# Altium PCB PCB1.PcbDoc
Units mil, origin at the board's own origin, x right, y up, seen from the top; angles counter-clockwise.
Board outline 6000 x 4000 mil, 2 copper layers (Top Layer, Bottom Layer); 28 components, 18 nets, 93 pads, 134 vias.
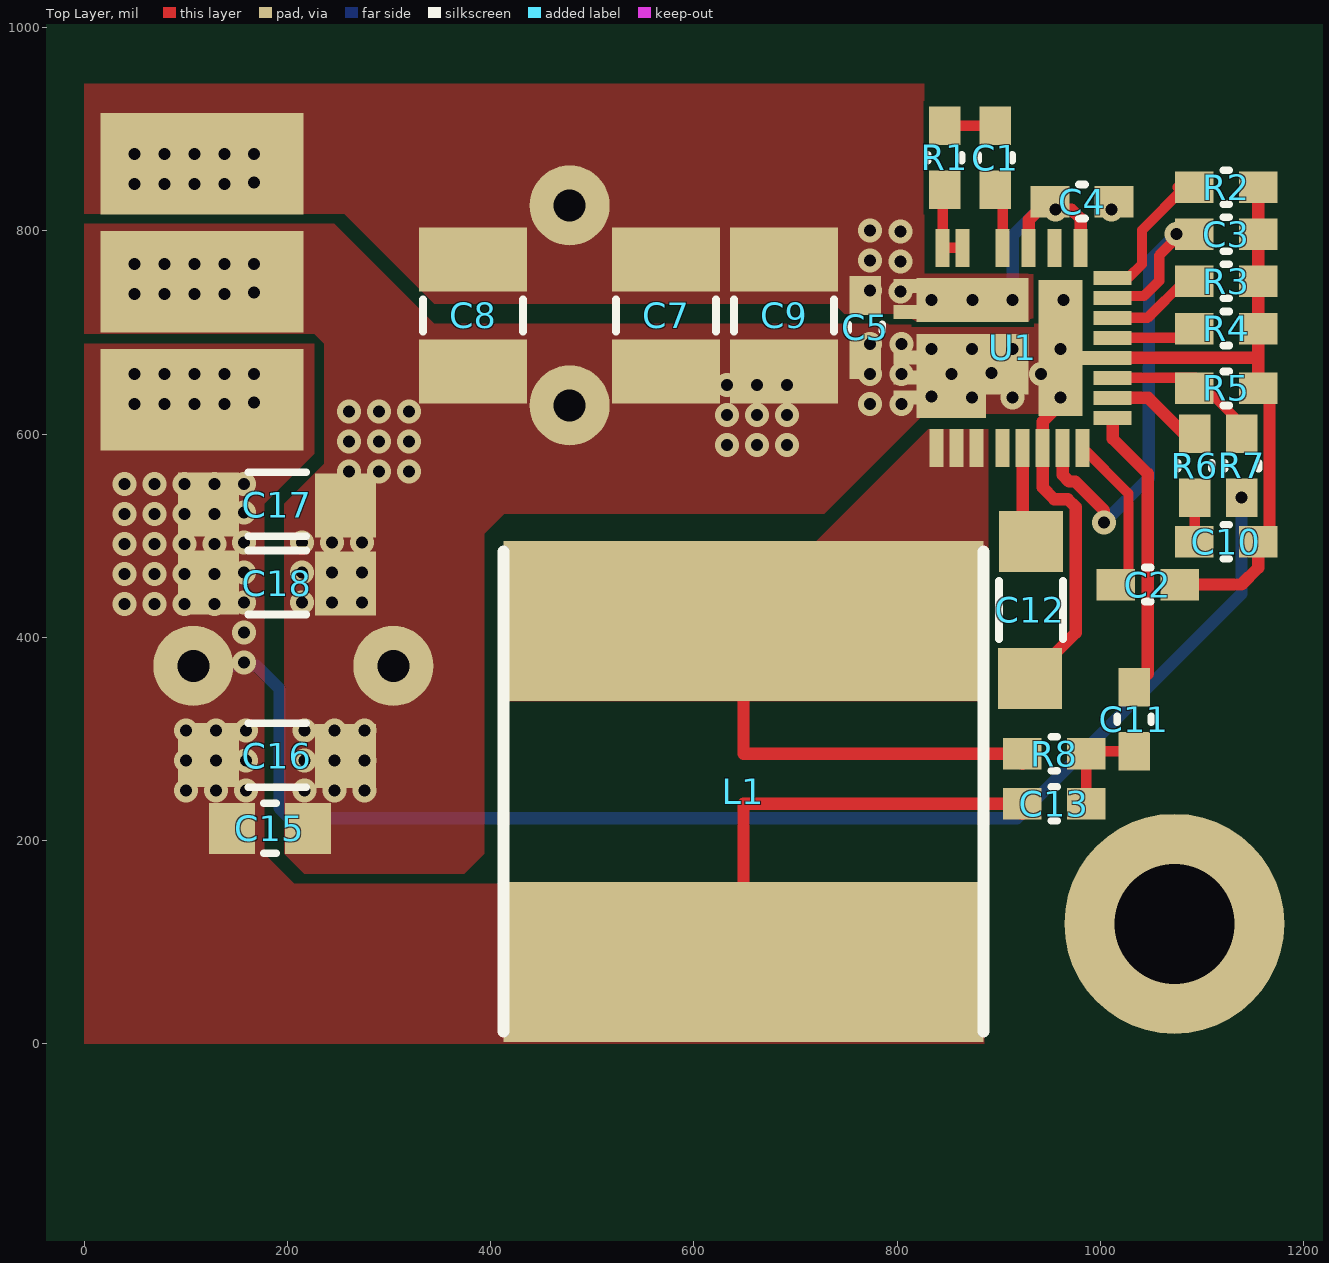
[diagram p0: Top Layer view]
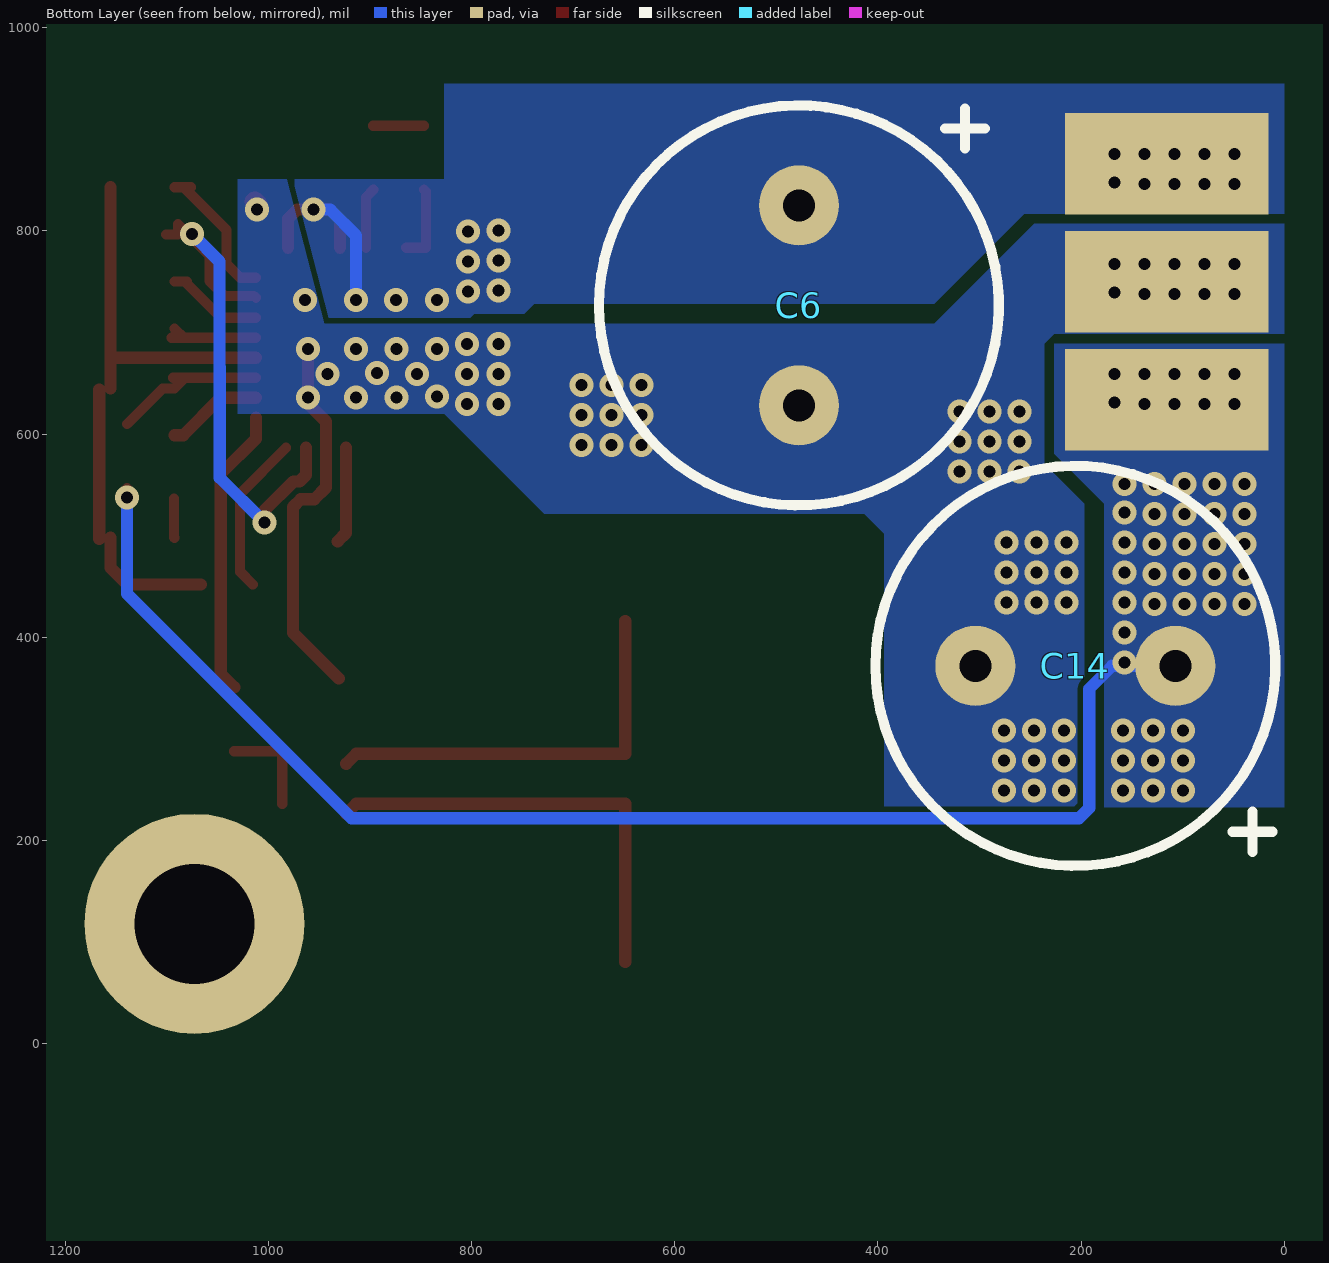
[diagram p1: Bottom Layer view, seen from below]
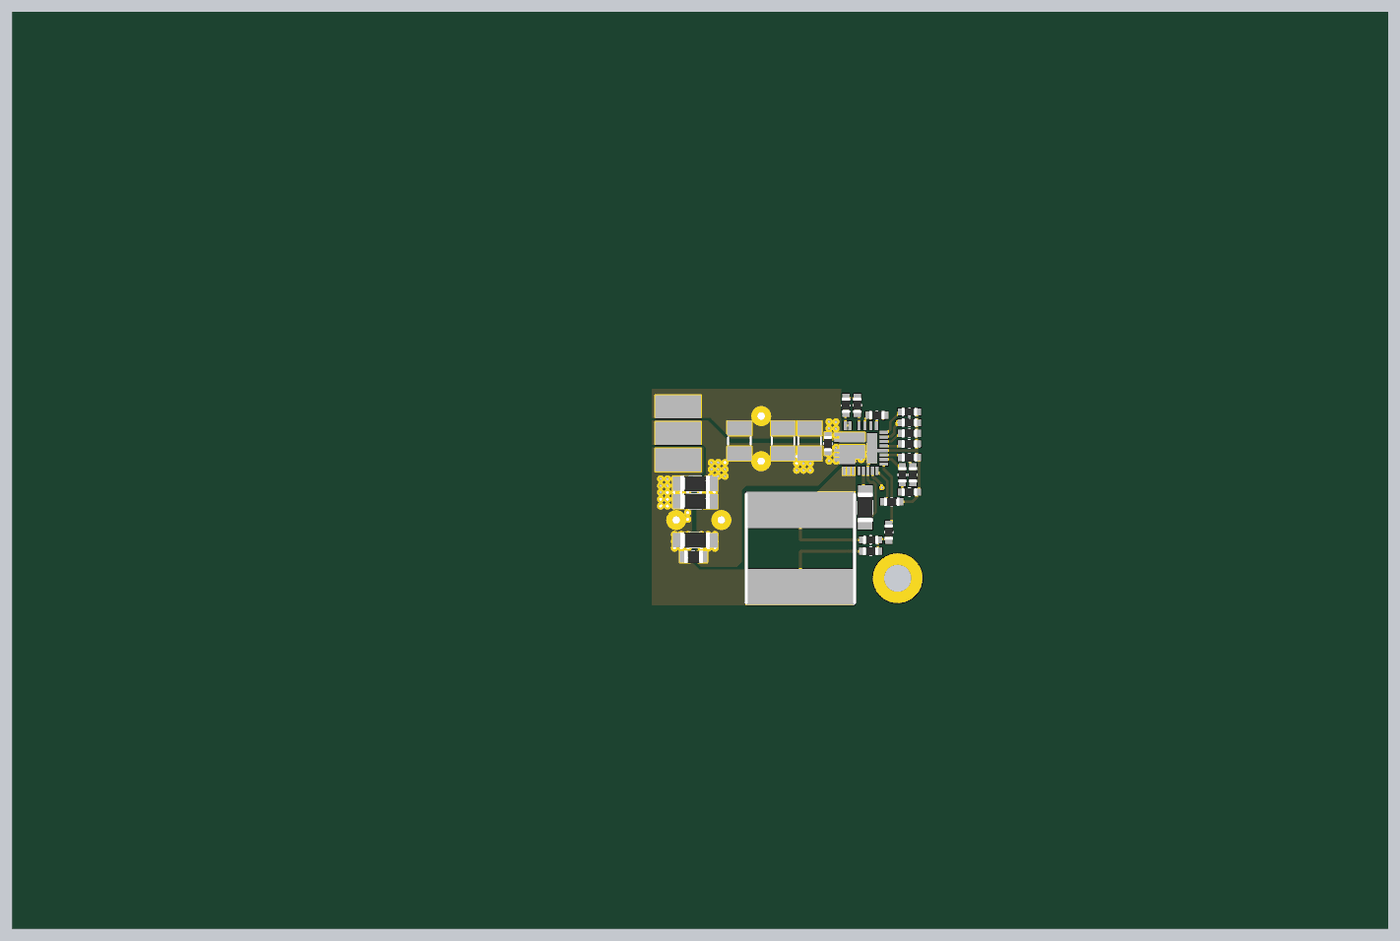
[diagram p2: 3D render of the assembled board from above, using the file's embedded part models]

## Layer stack, top to bottom
Top Solder: solder mask 0.4, Solder Resist, Dk 3.5
Top Layer: signal copper 1.4
Dielectric 1: dielectric 12.6, FR-4, Dk 4.8
Bottom Layer: signal copper 1.4
Bottom Solder: solder mask 0.4, Solder Resist, Dk 3.5

## Board outline
-2788,-1411 3212,-1411 3212,2589 -2788,2589

## Design rules (kind name [scope] priority, off if disabled: settings)
Clearance [All] p1: gap=5.5 ignorepadtopadclearanceinfootprint=FALSE
PolygonConnect [All] p1: connectstyle=Direct reliefconductorwidth=10 reliefentries=4 polygonreliefangle="90 Angle" airgapwidth=10
RoutingVias [All] p1: holewidth=28 width=50 viastyle="Through Hole" minholewidth=28 minwidth=50 maxholewidth=28 maxwidth=50
SilkToSilkClearance [All] p1 off: silktosilkclearance=10
SilkToSolderMaskClearance [IsPad] p1 off: minsilkscreentomaskgap=10 clearancetoexposedcopper=TRUE
SolderMaskExpansion [All] p1: expansion=4
Width [All] p1: maxlimit=500 minlimit=10 preferedwidth=10 minimp=50.000000 maximp=50.000000 favimp=50.000000
28 further rules are at their usual default settings.

## Components (designator, comment, footprint, x,y, rotation, side; value= is the part's Value field where it differs from the comment)
C1 "0.1Uf" RR_0603 896.75,872 r270 top
C2 "33nF" RR_0603 1046.75,452 r0 top
C3 "1uF" RR_0603 1123.94,796.67 r180 top
C4 "0.1Uf" RR_0603 982,829 r0 top
C5 "0.1Uf" RR_0603 768.75,705 r270 top
C6 "100uF 63V" RR_CAP-RAD-D10x9 477.75,726.81 r270 bottom
C7 "2.2uF" RR_1210 572.75,717 r90 top
C8 "2.2uF" RR_1210 382.75,717 r90 top
C9 "2.2uF" RR_1210 688.75,717 r90 top
C10 "220p" RR_0603 1123.94,494 r180 top
C11 "2.2nF" RR_0603 1033.46,319.45 r270 top
C12 "4.7uF" RR_1206 931.75,427 r90 top
C13 "1.2nF" RR_0603 954.72,236.22 r180 top
C14 "100u, 20V" RR_CAP-RAD-D10x9 205.68,372 r0 bottom
C15 "0.1Uf" RR_0805 182.75,212 r0 top
C16 "22uF" RR_1206 189.75,284 r180 top
C17 "DNP" RR_1206 189.75,531 r180 top
C18 "22uF" RR_1206 189.75,454 r180 top
L1 "" RR_IND_CMD_12x12 648.75,248.2 r90 top
R1 "3.3" RR_0603 846.75,872 r90 top
R2 "2K" RR_0603 1123.94,843 r0 top
R3 "60.4k" RR_0603 1123.94,750.33 r180 top
R4 "127K" RR_0603 1123.94,704 r180 top
R5 "10K" RR_0603 1123.94,645 r180 top
R6 "732K" RR_0603 1092.94,569 r90 top
R7 "140K" RR_0603 1139,569 r270 top
R8 "17.4K" RR_0603 954.72,285.43 r180 top
U1 "SiC462" SIC462 913.75,685 r270 top

## Footprints (in the part's own frame and the unit in brackets; to place one, negate y for a bottom-side part, rotate by r counter-clockwise, add the part's x,y. Pads: shape width x height; smd on the part's side, far side on the other; paste and mask are expansions set on the pad)
RR_0603 [mil] "Chip Resistor; Body 1.6 x 0.8 mm (LxW typ)"
  rect 38x31 smd: 1(-31.5,0) 2(31.5,0)
  silkscreen extent -3,-17 3,17, body extent -33,-18 33,18, height 22
RR_0805 [mil] "Chip Resistor; Body 1.6 x 0.8 mm (LxW typ)"
  rect 45x50 smd: 1(-37.5,0) 2(37.5,0)
  silkscreen extent -6,-25 6,25, body extent -41,-27 41,27, height 24
RR_1206 [mil] "Chip Resistor; Body 1.6 x 0.8 mm (LxW typ)"
  rect 60x63 smd: 1(-67.5,0.98) 2(67.5,0)
  silkscreen extent -29,-31 29,31, body extent -65,-33 65,33, height 26
RR_1210 [mm] "Chip Capacitor; Body 3.2 x 2.5 mm (LxW typ)"
  rect 1.6x2.7 smd: 1(-1.4,0) 2(1.4,0)
  silkscreen extent -0.4,-1.25 0.4,1.25, body extent -1.6,-1.25 1.6,1.25, height 2.5
RR_CAP-RAD-D10x9 [mm] "pitch 5mm"
  round 2 hole 0.8: 1(-2.5,0) 2(2.5,0)
  silkscreen extent -5,-5 5,5, body extent -5.08,-5.08 5.08,5.08, height 11.5
RR_IND_CMD_12x12 [mm]
  rect 4x12 smd: 1(-4.262,0) 2(4.262,0)
  silkscreen extent -6,-6 6,6, body extent -6,-6 6,6, height 10
SIC462 [mm]
  rect 0.95x0.35 smd: 1(-2.5,1.7) 2(-2.5,1.05) 3(-2.5,0.4) 4(-2.5,-0.25) 5(-2.5,-1.25) 6(-2.5,-1.75) 12(2.5,-0.9) 12(2.5,-1.9) 12(2.5,-1.4) 15(2.5,-0.25) 16(2.5,0.25) 17(2.5,0.75) 18(2.5,1.25) 19(2.5,1.75)
  rect 0.35x0.95 smd: 7(-1.54,-2.5) 7(-0.89,-2.5) 9(0.24,-2.5) 9(0.74,-2.5) 9(1.24,-2.5) 20(1.75,2.5) 21(1.25,2.5) 22(0.75,2.5) 23(0.25,2.5) 23(0.25,2) 24(-0.25,2.5) 25(-0.75,2.5) 26(-1.25,2.5) 27(-1.75,2.5)
  rect 1.1x2.8 smd: 7(-1.2,-1)
  rect 1.52x1.1 smd: 9(0.41,-0.15)
  rect 2.1x1.73 smd: 9(0.7,-1.535)
  rect 3.4x1.1 smd: 23(0,1.2)
  body extent -2.5,-2.5 2.5,2.5, height 1

## Part data
C1 C4 C5 C15: library part "CAP NP", "Ceramic Cap, 0.1uF,100volts, X7S, 10%, 0603", Mfr="Murata Electronics", Mfr Part Number=C1608X7S2A104K080AB, Package=0603, Tolerance=10%, Value1=0.1uF, Data sheet\=http://www.mouser.com/ds/2/400/lcc_commercial_general_en-837201.pdf, Description1="Ceramic Cap, 0.1uF,100volts, X7S, 10%, 0603", Description2="Ceramic Cap, 0.1uF,100volts, X7S, 10%, 0603", DIGI-KEY=810-C1608X7S2A104K, DigikeyMouser=810-C1608X7S2A104K, Package1=0603, Package2=0603, PCB Footprint1=0603, PCB Footprint2=0603, Value2=0.1uF
C2: library part "CAP NP", "Ceramic Cap, 0.033uF,50V,X7R,0603,10%", Manufacturer=Vishay, Manufacturer Part=VJ0603Y333KXACW1BC, Mfr="Vishay / Vitramon", Package=0603, Tolerance=10%, Voltage=50V, Data sheet\=http://www.mouser.com/ds/2/427/vjw1bcbascomseries-223529.pdf, Description1="Ceramic Cap, 0.033uF,50V,X7R,0603,10%", Description2="Ceramic Cap, 0.033uF,50V,X7R,0603,10%", DIGI-KEY=77-VJ0603Y333KXACBC, DigikeyMouser=77-VJ0603Y333KXACBC, Manufacturer1=Vishay, Manufacturer2=Vishay, Manufacturer Part1=VJ0603Y333KXACW1BC, Manufacturer Part2=VJ0603Y333KXACW1BC, Mfr Part Number=VJ0603Y333KXACW1BC, Package1=0603, Package2=0603, Value1=33nF, Value2=33nF
C3: library part "CAP NP", "Ceramic Cap, 1uF,50V, X7R,0603,10%", Manufacturer="Taiyo Yuden", Manufacturer Part=UMK107AB7105KA-T, Package=0603, Tolerance=10%, Voltage=50V, Data sheet\=http://www.mouser.com/ds/2/396/mlcc11_hq_e-541564.pdf, Description1="Ceramic Cap, 1uF,50V, X7R,0603,10%", Description2="Ceramic Cap, 1uF,50V, X7R,0603,10%", DIGI-KEY=963-UMK107AB7105KA-T, DigikeyMouser=963-UMK107AB7105KA-T, Manufacturer1="Taiyo Yuden", Manufacturer2="Taiyo Yuden", Manufacturer Part1=UMK107AB7105KA-T, Manufacturer Part2=UMK107AB7105KA-T, Mfr="Taiyo Yuden", Mfr Part Number=UMK107AB7105KA-T, Package1=0603, Package2=0603, Value1=1uF, Value2=1uF
C6: library part "CAP POL", "CAP, alum, 100uF, 63volt, 105C, 10x12, 4khr", Manufacturer=Vishay, Mfr Part Number=MAL215058101E3, Rating=63V, Tolerance=20%, Data sheet\=http://www.mouser.com/ds/2/427/150rmi-222630.pdf, DIGI-KEY=594-2222-150-58101, DigikeyMouser=594-2222-150-58101, Mfr=Vishay, Part Type="CAP POL"
C7 C8 C9: library part "CAP NP", "Ceramic Cap, 2.2uF,100volts, X7R, 10%, 1210", Mfr="Murata Electronics", Mfr Part Number=GRM32ER72A225KA35K, Data sheet\=http://www.mouser.com/ds/2/281/c02e-2905.pdf, Description1="Ceramic Cap, 2.2uF,100volts, X7R, 10%, 1210", Description2="Ceramic Cap, 2.2uF,100volts, X7R, 10%, 1210", DIGI-KEY=81-GRM32ER72A225KA5K, DigikeyMouser=81-GRM32ER72A225KA5K, Value1=2.2uF, Value2=2.2uF
C10: library part "CAP NP", "Ceramic Cap, 220p,100V,COG,0603, 5%", Manufacturer=Vishay, Manufacturer Part=VJ0603A221JXBPW1BC, Package=0603, Tolerance=5%, Voltage=100V, Data sheet\=http://www.mouser.com/ds/2/427/vjw1bcbascomseries-223529.pdf, Description1="Ceramic Cap, 220p,100V,COG,0603, 5%", Description2="Ceramic Cap, 220p,100V,COG,0603, 5%", DIGI-KEY=77-VJ0603A221JXBPBC, DigikeyMouser=77-VJ0603A221JXBPBC, Manufacturer1=Vishay, Manufacturer2=Vishay, Manufacturer Part1=VJ0603A221JXBPW1BC, Manufacturer Part2=VJ0603A221JXBPW1BC, Mfr=Vishay, Mfr Part Number=VJ0603A221JXBPW1BC, Package1=0603, Package2=0603, Value1=220p, Value2=220p
C11: library part "CAP NP", "Ceramic Cap, 2200pF,100V,X7R,0603, 5%", Manufacturer=Vishay, Manufacturer Part=VJ0603Y222JXBCW1BC, Package=0603, Tolerance=5%, Voltage=100V, Data sheet\=http://www.mouser.com/ds/2/427/vjw1bcbascomseries-223529.pdf, Description1="Ceramic Cap, 2200pF,100V,X7R,0603, 5%", Description2="Ceramic Cap, 2200pF,100V,X7R,0603, 5%", DIGI-KEY=77-VJ0603Y222JXBCBC, DigikeyMouser=77-VJ0603Y222JXBCBC, Manufacturer1=Vishay, Manufacturer2=Vishay, Manufacturer Part1=VJ0603Y222JXBCW1BC, Manufacturer Part2=VJ0603Y222JXBCW1BC, Mfr=Vishay, Mfr Part Number=VJ0603Y222JXBCW1BC, Package1=0603, Package2=0603, Value1=2.2nF, Value2=2.2nF
C12: library part "CAP NP", "Ceramic Cap, 4.7uF,25V,X6S,10%,0603", Mfr=Murata, Mfr Part Number=GRM188C81E475KE11D, Tolerance=10%, Voltage=25V, Data sheet\=http://www.mouser.com/ds/2/281/c02e-2905.pdf, Description1="Ceramic Cap, 4.7uF,25V,X6S,10%,0603", Description2="Ceramic Cap, 4.7uF,25V,X6S,10%,0603", DIGI-KEY=81-GRM188C81E475KE1D, DigikeyMouser=81-GRM188C81E475KE1D, Value1=4.7uF, Value2=4.7uF
C13: library part "CAP NP", "Ceramic Cap, 1.2nF,100V,X7R,0805, 10%", Manufacturer=Vishay, Manufacturer Part=VJ0805Y122KXBPW1BC, Mfr="Vishay / Vitramon", Package=0805, Tolerance=10%, Voltage=100V, Data sheet\=http://www.mouser.com/ds/2/427/vjw1bcbascomseries-223529.pdf, Description1="Ceramic Cap, 1.2nF,100V,X7R,0805, 10%", Description2="Ceramic Cap, 1.2nF,100V,X7R,0805, 10%", DIGI-KEY=77-VJ0805Y122KXBPBC, DigikeyMouser=77-VJ0805Y122KXBPBC, Manufacturer1=Vishay, Manufacturer2=Vishay, Manufacturer Part1=VJ0805Y122KXBPW1BC, Manufacturer Part2=VJ0805Y122KXBPW1BC, Mfr Part Number=VJ0805Y122KXBPW1BC, Package1=0805, Package2=0805, Value1=1.2nF, Value2=1.2nF
C14: library part "CAP, TA-P,V,470u, 2V_0", "Polymer SMD 20volts 100uF ESR 55mohm 7343", Mfr=Panasonic, Mfr Part Number=20TQC100MYF, Data sheet\=http://www.mouser.com/ds/2/315/AAA8000C54-931458.pdf, DIGI-KEY=667-20TQC100MYF, DigikeyMouser=667-20TQC100MYF
C16 C18: library part "CAP NP", "Ceramic Cap, 22uF,25volts,X7R,10%,1206", Mfr="AVX Corporation", Mfr Part Number=12061C225KAT2A, Tolerance=10%, Voltage=100V, Data sheet\=http://www.mouser.com/ds/2/40/X7RDielectric-777024.pdf, Description1="Ceramic Cap, 22uF,25volts,X7R,10%,1206", Description2="Ceramic Cap, 22uF,25volts,X7R,10%,1206", DIGI-KEY=581-12061C225KAT2A, DigikeyMouser=581-12061C225KAT2A, Value1=22uF, Value2=22uF
C17: library part "CAP NP", "Ceramic Cap, 22uF,25volts,X7R,10%,1206", Mfr="AVX Corporation", Mfr Part Number=12061C225KAT2A, Tolerance=10%, Value1=22uF, Voltage=100V, Data sheet\=http://www.mouser.com/ds/2/40/X7RDielectric-777024.pdf, Description1="Ceramic Cap, 22uF,25volts,X7R,10%,1206", Description2="Ceramic Cap, 22uF,25volts,X7R,10%,1206", DIGI-KEY=581-12061C225KAT2A, DigikeyMouser=581-12061C225KAT2A, Value2=22uF
L1: library part IND, "INDUCTOR, 3.3uH,20%,14m DCR,18.6A Saturation", Current=8A, Manufacturer=Vishay, Manufacturer Part=IHLP4040DZER3R3M11, Manufacturer Part1=IHLP4040DZER5R6M01, Manufacturer Part2=IHLP5050FDER100M01, Mfr="Vishay Dale", Mfr Part Number=IHLP4040DZER100M01, Package1=4040, Package2=5050, PSpice Template="L^@REFDES %A %B @ MODEL @VALUE", Value1=5.6uH, Value2=10uH, Data sheet\=http://www.vishay.com/docs/34193/lp40dz01.pdf, Description1="INDUCTOR, 5.6uH,20%,19m DCR,16A Saturation", Description2="INDUCTOR, 10uH,20%,17.2m DCR,15.5A Saturation", DigikeyMouser=541-1295-1-ND, Manufacturer1=Vishay, Manufacturer2=Vishay
R1: library part RESISTOR, "SMD,3.3Ohm, 1% 0603", Man Part Number=CRCW06033R30FKEA, Manufacturer=Vishay, Manufacturer Part=CRCW06030000ZSTA, Package=0603, Data sheet\=http://www.mouser.com/ds/2/427/dcrcwe3-109170.pdf, Description1="SMD,3.3Ohm, 1% 0603", Description2="SMD,3.3Ohm, 1% 0603", DIGI-KEY=71-CRCW06033R30FKEA, DigikeyMouser=71-CRCW06033R30FKEA, Man=Vishay, Man1=Vishay, Man2=Vishay, Man Part Number1=CRCW06033R30FKEA, Man Part Number2=CRCW06033R30FKEA, Manufacturer1=Vishay, Manufacturer2=Vishay, Manufacturer Part1=CRCW06030000ZSTA, Manufacturer Part2=CRCW06030000ZSTA, Mfr=Vishay, Mfr Part Number=CRCW06033R30FKEA, Package1=0603, Package2=0603, PCB Footprint1=0603, PCB Footprint2=0603, Value1=3.3, Value2=3.3
R2: library part RESISTOR, "SMD,2K,1%,0603", Manufacturer=Vishay, Manufacturer Part=CRCW06032K00FKEB, Mfr="Vishay Dale", Package=0603, Tolerance=1%, Data sheet\=http://www.mouser.com/ds/2/427/dcrcwe3-109170.pdf, Description1=SMD,2K,1%,0603, Description2=SMD,2K,1%,0603, DIGI-KEY=71-CRCW06032K00FKEB, DigikeyMouser=71-CRCW06032K00FKEB, Manufacturer1=Vishay, Manufacturer2=Vishay, Manufacturer Part1=CRCW06032K00FKEB, Manufacturer Part2=CRCW06032K00FKEB, Mfr Part Number=CRCW06032K00FKEB, Package1=0603, Package2=0603, Value1=2K, Value2=2K
R3: library part RESISTOR, "SMD,60.4K,1%,0603", Manufacturer=Vishay, Manufacturer Part=CRCW060360K4FKEA, Mfr="Vishay Dale", Package=0603, Tolerance=1%, Value1=60.4K, Data sheet\=http://www.digikey.com/product-detail/en/vishay-dale/CRCW04024K64FKED/541-4.64KLCT-ND/1183198, Description1=SMD,60.4K,1%,0603, Description2=SMD,60.4K,1%,0603, DIGI-KEY=71-CRCW0603-60.4K-E3, DigikeyMouser=71-CRCW0603-60.4K-E3, Manufacturer1=Vishay, Manufacturer2=Vishay, Manufacturer Part1=CRCW060360K4FKEA, Manufacturer Part2=CRCW060360K4FKEA, Mfr Part Number=CRCW060360K4FKEA, Package1=0603, Package2=0603, Value2=60.4K
R4: library part RESISTOR, "SMD,127K,1%,0603 100PPM", Manufacturer=Vishay, Manufacturer Part=CRCW0603127KFKEA, Mfr="Vishay Dale", Package=0603, Tolerance=1%, Data sheet\=http://www.mouser.com/ds/2/427/dcrcwe3-109170.pdf, Description1="SMD,127K,1%,0603 100PPM", Description2="SMD,127K,1%,0603 100PPM", DIGI-KEY=71-CRCW0603-127K-E3, DigikeyMouser=71-CRCW0603-127K-E3, Manufacturer1=Vishay, Manufacturer2=Vishay, Manufacturer Part1=CRCW0603127KFKEA, Manufacturer Part2=CRCW0603127KFKEA, Mfr Part Number=CRCW0603127KFKEA, Package1=0603, Package2=0603, Value1=127K, Value2=127K
R5: library part RESISTOR, "SMD,10K,1%,0603", Manufacturer=Vishay, Manufacturer Part=CRCW060310K0FKTA, Mfr="Vishay Dale", Package=0603, Tolerance=1%, Data sheet\=http://www.mouser.com/ds/2/427/dcrcwe3-109170.pdf, Description1=SMD,10K,1%,0603, Description2=SMD,10K,1%,0603, DIGI-KEY=71-CRCW0603-10K, DigikeyMouser=71-CRCW0603-10K, Manufacturer1=Vishay, Manufacturer2=Vishay, Manufacturer Part1=CRCW060310K0FKTA, Manufacturer Part2=CRCW060310K0FKTA, Mfr Part Number=CRCW060310K0FKTA, Package1=0603, Package2=0603, Value1=10K, Value2=10K
R6: library part RESISTOR, "SMD 1/10watt 732 kOhms 1%,0603", Manufacturer=Vishay, Manufacturer Part=CRCW0603732KFKEA, Mfr="Vishay Dale", Package=0603, Tolerance=1%, Data sheet\=http://www.mouser.com/ds/2/427/dcrcwe3-109170.pdf, Description1="SMD 1/10watt 732 kOhms 1%,0603", Description2="SMD 1/10watt 732 kOhms 1%,0603", DIGI-KEY=71-CRCW0603-732K-E3, DigikeyMouser=71-CRCW0603-732K-E3, Manufacturer1=Vishay, Manufacturer2=Vishay, Manufacturer Part1=CRCW0603732KFKEA, Manufacturer Part2=CRCW0603732KFKEA, Mfr Part Number=CRCW0603732KFKEA, Package1=0603, Package2=0603, Value1=732K, Value2=732K
R7: library part RESISTOR, "SMD 1,10W 140K Ohms 1% 0603", Manufacturer=Vishay, Manufacturer Part=CRCW0603140KFKEA, Mfr="Vishay Dale", Package=0603, Tolerance=1%, Data sheet\=http://www.mouser.com/ds/2/427/dcrcwe3-109170.pdf, Description1="SMD 1,10W 140K Ohms 1% 0603", Description2="SMD 1,10W 140K Ohms 1% 0603", DIGI-KEY=71-CRCW0603-140K-E3, DigikeyMouser=71-CRCW0603-140K-E3, Manufacturer1=Vishay, Manufacturer2=Vishay, Manufacturer Part1=CRCW0603140KFKEA, Manufacturer Part2=CRCW0603140KFKEA, Mfr Part Number=CRCW0603140KFKEA, Package1=0603, Package2=0603, Value1=140K, Value2=140K
R8: library part RESISTOR, "Resistors - SMD 1/8watt 17.4Kohms 1% 0805", Mfr="Vishay Dale", Mfr Part Number=CRCW080517K4FKTA, Tolerance=1%, Data sheet\=http://www.mouser.com/ds/2/427/dcrcw-72725.pdf, Description1="Resistors - SMD 1/8watt 17.4Kohms 1% 0805", Description2="Resistors - SMD 1/8watt 17.4Kohms 1% 0805", DIGI-KEY=71-CRCW0805-17.4K, DigikeyMouser=71-CRCW0805-17.4K
U1: library part SiC462CD-T1-GE3_27, "4.5~60V,6A, High Voltage microBuck", Man Part Number=SiC462ED-T1-GE3, Mfr=Vishay, Data sheet\=http://www.mouser.com/ds/2/427/sic462-1061838.pdf, Description1="4.5~60V,6A, High Voltage microBuck", Description2="4.5~60V,6A, High Voltage microBuck", DIGI-KEY=78-SIC462ED-T1-GE3, DigikeyMouser=78-SIC462ED-T1-GE3, Man=Vishay, Man1=Vishay, Man2=Vishay, Man Part Number1=SiC462ED-T1-GE3, Man Part Number2=SiC462ED-T1-GE3, Mfr Part Number=SiC462ED-T1-GE3, PCB Footprint1=5mmx5mm, PCB Footprint2=5mmx5mm, Value1=SiC462, Value2=SiC462

## Free pads (board coordinates)
  rect 200x100 smd: 2(115.75,634) 2(115.75,750) 2(115.75,866)
  rect 200x100 smd far side: 2(115.75,634) 2(115.75,750) 2(115.75,866)
  round 216.54 hole 118.11: 3(1072.83,118.11)

## Via types
v1: diameter 23.62, hole 11.81, Top Layer to Bottom Layer, 134 vias

## Nets (pads, with @x,y where several pads share a name; then routed paths per layer and width w, separated by ;. In a path a pad name is that pad's centre, name@x,y a point inside that pad or via, vN(x,y) a via of type N, cw(c..) or ccw(c..) an arc to the next point about the centre after c; other vN are vias at no path point)
AGND: C2.2 C3.1 C4.2 C5.2 C6.2 C7.1 C8.1 C9.1 C10.1 C12.1 C14.2 C15.2 C16.1 C17.1 C18.1 pad.2@115.75,750 R2.2 R3.1 R4.1 R5.1 U1.9 U1.17 U1.23 | length 995.3
  Top Layer w12: C12.1 975.75,404.48 975.75,528.26 968.01,536 954.75,536 943.28,547.47 U1.17 943.28,612.53 960.99,630.24 v1(960.99,636.06) v1(960.99,684) U1.23@960.99,685 ; U1.23@1012.17,675.16 1155.44,675.16 ; C2.2@1066.44,452 C2.2 1138.94,452 1155.44,468.5 C10.1 C10.1@1155.44,498 ; R5.1 1155.44,675.16 ; R2.2 C3.1 R3.1 R4.1 1155.44,675.16 ; C10.1@1166.44,497 R5.1@1166.44,644
  Top Layer w20: v1(1011,821) 1011,826.5 C4.2
  other v1: 216.94,249.47 246.47,249.47 276,249.47 216.94,279 246.47,279 276,279 216.94,308.53 246.47,308.53 276,308.53 214.47,434.47 244,434.47 273.53,434.47 214.47,464 244,464 273.53,464 214.47,493.53 244,493.53 273.53,493.53 260.47,563.47 290,563.47 319.53,563.47 632.47,589.47 662,589.47 691.53,589.47 260.47,593 290,593 319.53,593 632.47,619 662,619 691.53,619 260.47,622.53 290,622.53 319.53,622.53 773.53,629.47 804.53,629.47 873.75,636.06 913.75,636.06 833.75,637 632.47,648.53 662,648.53 691.53,648.53 773.53,659 804.53,659 853.53,659 941.53,659 893,660 833.75,684 873.75,684 913.75,684 773.53,688.53 804.53,688.53 963.75,732.24 49.21,738.19 78.74,738.19 108.27,738.19 137.8,738.19 167.13,739.38 49.21,767.72 78.74,767.72 108.27,767.72 137.8,767.72 167.13,767.72
BOOT: C1.2 U1.4 | length 60
  Top Layer w10: C1.2 903.91,833.34 U1.4
COMP: R6.2 U1.21 | length 95.5
  Top Layer w12: U1.21 1046.96,635.79 1083.75,599 R6.2@1092.44,599
FSW: R4.2 U1.24 | length 95.9
  Top Layer w10: U1.24 R4.2@1083.28,694.84 ; R4.2 R4.2@1083.28,694.84 ; R4.2@1095.09,694.84 1087.22,694.84 R4.2@1083.28,694.84
ILIM: R3.2 U1.25 | length 97.2
  Top Layer w10: U1.25 1046.53,714.53 R3.2@1082.33,750.33 ; R3.2@1080.27,750.33 R3.2@1082.33,750.33 ; R3.2 R3.2@1082.33,750.33
MODE: R2.1 U1.27 | length 144.1
  Top Layer w10: U1.27 1027.65,753.9 1041,767.25 1041,800.84 R2.1@1083.16,843 ; R2.1@1075.94,843 R2.1@1083.16,843 ; R2.1 R2.1@1083.16,843
NetC1_1: C1.1 R1.2 | length 50
  Top Layer w10: R1.2 C1.1
NetC10_2: C10.2 R6.1 | length 38.7
  Top Layer w10: C10.2@1092.44,498 1092.94,498.5 R6.1@1092.94,536.5
NetC11_1: C11.1 U1.20 | length 285
  Top Layer w12: U1.20 1012.17,595.57 1046.75,561 1046.75,364.23 C11.1
NetC11_2: C11.2 C13.1 R8.1 | length 97.5
  Top Layer w10: C13.1 R8.1 988.74,287.95 C11.2
NetC12_2: C12.2 U1.16 | length 95.5
  Top Layer w12: U1.16 923.59,502.66 C12.2
NetL1_2: L1.2 R8.2 U1.12 | length 409.1
  Top Layer w12: L1.2 648.75,285.43 913.38,285.43 R8.2@923.22,275.59
NetR1_1: R1.1 U1.5 U1.6 | length 77.5
  Top Layer w10: R1.1 844.85,838.6 U1.6 U1.5
SS: C2.1 U1.19 | length 158.4
  Top Layer w10: U1.19 1027.75,541.47 1027.75,464.5 C2.1
VDD1: C3.2 U1.18 U1.26 | length 550.6
  Top Layer w10: U1.26 1014.06,736.1 1043.1,736.1 1058,751 1058,776 1088.94,806.94 C3.2@1088.94,796.67 ; C3.2@1089.42,796.67 C3.2 C3.2@1100.75,796.67
  Top Layer w12: U1.18 962.96,559.79 969.25,553.5 975.26,553.5 1003.75,525.01 v1(1003.75,513)
  Bottom Layer w12: v1(1003.75,513) 1047.75,557 1047.75,666 1048,666.25 1048,770.06 v1(1074.94,797)
VFB: R5.2 R7.1 U1.22 | length 157.5
  Top Layer w10: U1.22 R5.2@1081.96,655.47 ; R5.2@1093.78,655.47 R5.2@1081.96,655.47 ; R7.1@1139,610 1104,645 R5.2 R5.2@1081.96,655.47
VIN: C4.1 C5.1 C6.1 C7.2 C8.2 C9.2 pad.2@115.75,866 U1.1 U1.3 U1.7 | length 231
  Top Layer w12: U1.3 929.5,810.75 939.75,821 v1(955.75,821) 971.75,821 980.68,812.07 U1.1
  Bottom Layer w12: v1(913.75,732.24) 913.75,795.64 939.11,821 v1(955.75,821)
  other v1: 833.75,732.24 874.38,732.24 803.53,740.47 773.53,741.47 803.53,770 773.53,771 803.53,799.53 773.53,800.53 49.21,846.46 78.74,846.46 108.27,846.46 137.8,846.46 167.13,847.65 49.21,875.98 78.74,875.98 108.27,875.98 137.8,875.98 167.13,875.98
VO: C13.2 C14.1 C15.1 C16.2 C17.2 C18.2 L1.1 pad.2@115.75,634 R7.2 | length 1796.5
  Top Layer w10: v1(1139,537.5) R7.2@1139,547
  Top Layer w12: L1.1 648.75,236.22 913.38,236.22 C13.2@923.22,226.38
  Bottom Layer w12: C14.1@103.32,372 C14.1 169.34,372 192,349.34 192,232 202,222 918,222 1139,443 v1(1139,537.5)
  other v1: 99.94,249.47 129.47,249.47 159,249.47 99.94,279 129.47,279 159,279 99.94,308.53 129.47,308.53 159,308.53 157.29,375.2 157.29,404.73 39.37,433.07 68.9,433.07 98.43,433.07 127.95,433.07 157.29,434.26 39.37,462.6 68.9,462.6 98.43,462.6 127.95,462.6 157.29,463.79 39.37,492.13 68.9,492.13 98.43,492.13 127.95,492.13 157.29,493.32 39.37,521.65 68.9,521.65 98.43,521.65 127.95,521.65 157.29,522.84 39.37,551.18 68.9,551.18 98.43,551.18 127.95,551.18 157.29,551.18 49.21,629.92 78.74,629.92 108.27,629.92 137.8,629.92 167.13,631.11 49.21,659.45 78.74,659.45 108.27,659.45 137.8,659.45 167.13,659.45
pads on no net: U1.2 U1.15

## Polygon pours and split planes (outlines as drawn)
VO on Top Layer "G" (solid, remove dead copper, pour order 2): 0,688.98 0,0 885.83,0 885.83,157.48 206.69,157.48 177.17,187.01 177.17,531.5 226.38,580.71 226.38,688.98
NetL1_2 on Top Layer "G" (solid, remove dead copper, pour order 0): 889.75,605 889.75,337 415.75,337 415.75,491 417.75,493 718.75,493 830.75,605
AGND on Top Layer "G" (solid, remove dead copper, pour order 5): 0,807.09 0,698.82 226.38,698.82 236.22,688.98 236.22,570.87 196.85,531.5 196.85,187.01 216.54,167.32 374.02,167.32 393.7,187.01 393.7,501.97 413.39,521.65 728.35,521.65 826.77,620.08 974.41,620.08 974.41,748.03 944.88,748.03 944.88,708.66 344.49,708.66 246.06,807.09
VIN on Top Layer "G" (solid, remove dead copper, pour order 6): 0,944.88 0,816.93 255.91,816.93 344.49,728.35 738.19,728.35 748.03,718.5 797.24,718.5 807.09,708.66 935.04,708.66 935.04,757.87 826.77,757.87 826.77,944.88
VIN on Bottom Layer "G" (solid, remove dead copper, pour order 7): 0,944.88 0,816.93 255.91,816.93 344.49,728.35 738.19,728.35 748.03,718.5 797.24,718.5 807.09,708.66 974,708.66 974,851 826.77,851 826.77,944.88
AGND on Bottom Layer "G" (solid, remove dead copper, pour order 4): 0,807.09 0,698.82 226.38,698.82 236.22,688.98 236.22,570.87 196.85,531.5 196.85,187.01 216.54,167.32 374.02,167.32 393.7,187.01 393.7,501.97 413.39,521.65 728.35,521.65 826.77,620.08 1030,620.08 1030,851 982,851 944.88,708.66 344.49,708.66 246.06,807.09
VO on Bottom Layer "G" (solid, remove dead copper, pour order 3): 0,688.98 0,233 177.17,233 177.17,531.5 226.38,580.71 226.38,688.98

## Silkscreen, mask and mechanical layers (free items; w line width, h text height)
Mechanical 2:
  lines w10: 0,0 0,944.88 1181.1,944.88 1181.1,0 0,0